# Altium PCB RealimentacionLineal.PcbDoc
Units mm, origin at the board's own origin, x right, y up, seen from the top; angles counter-clockwise.
Board outline 50 x 50 mm, 2 copper layers (Top Layer, Bottom Layer); 25 components, 18 nets, 69 pads, 12 vias.
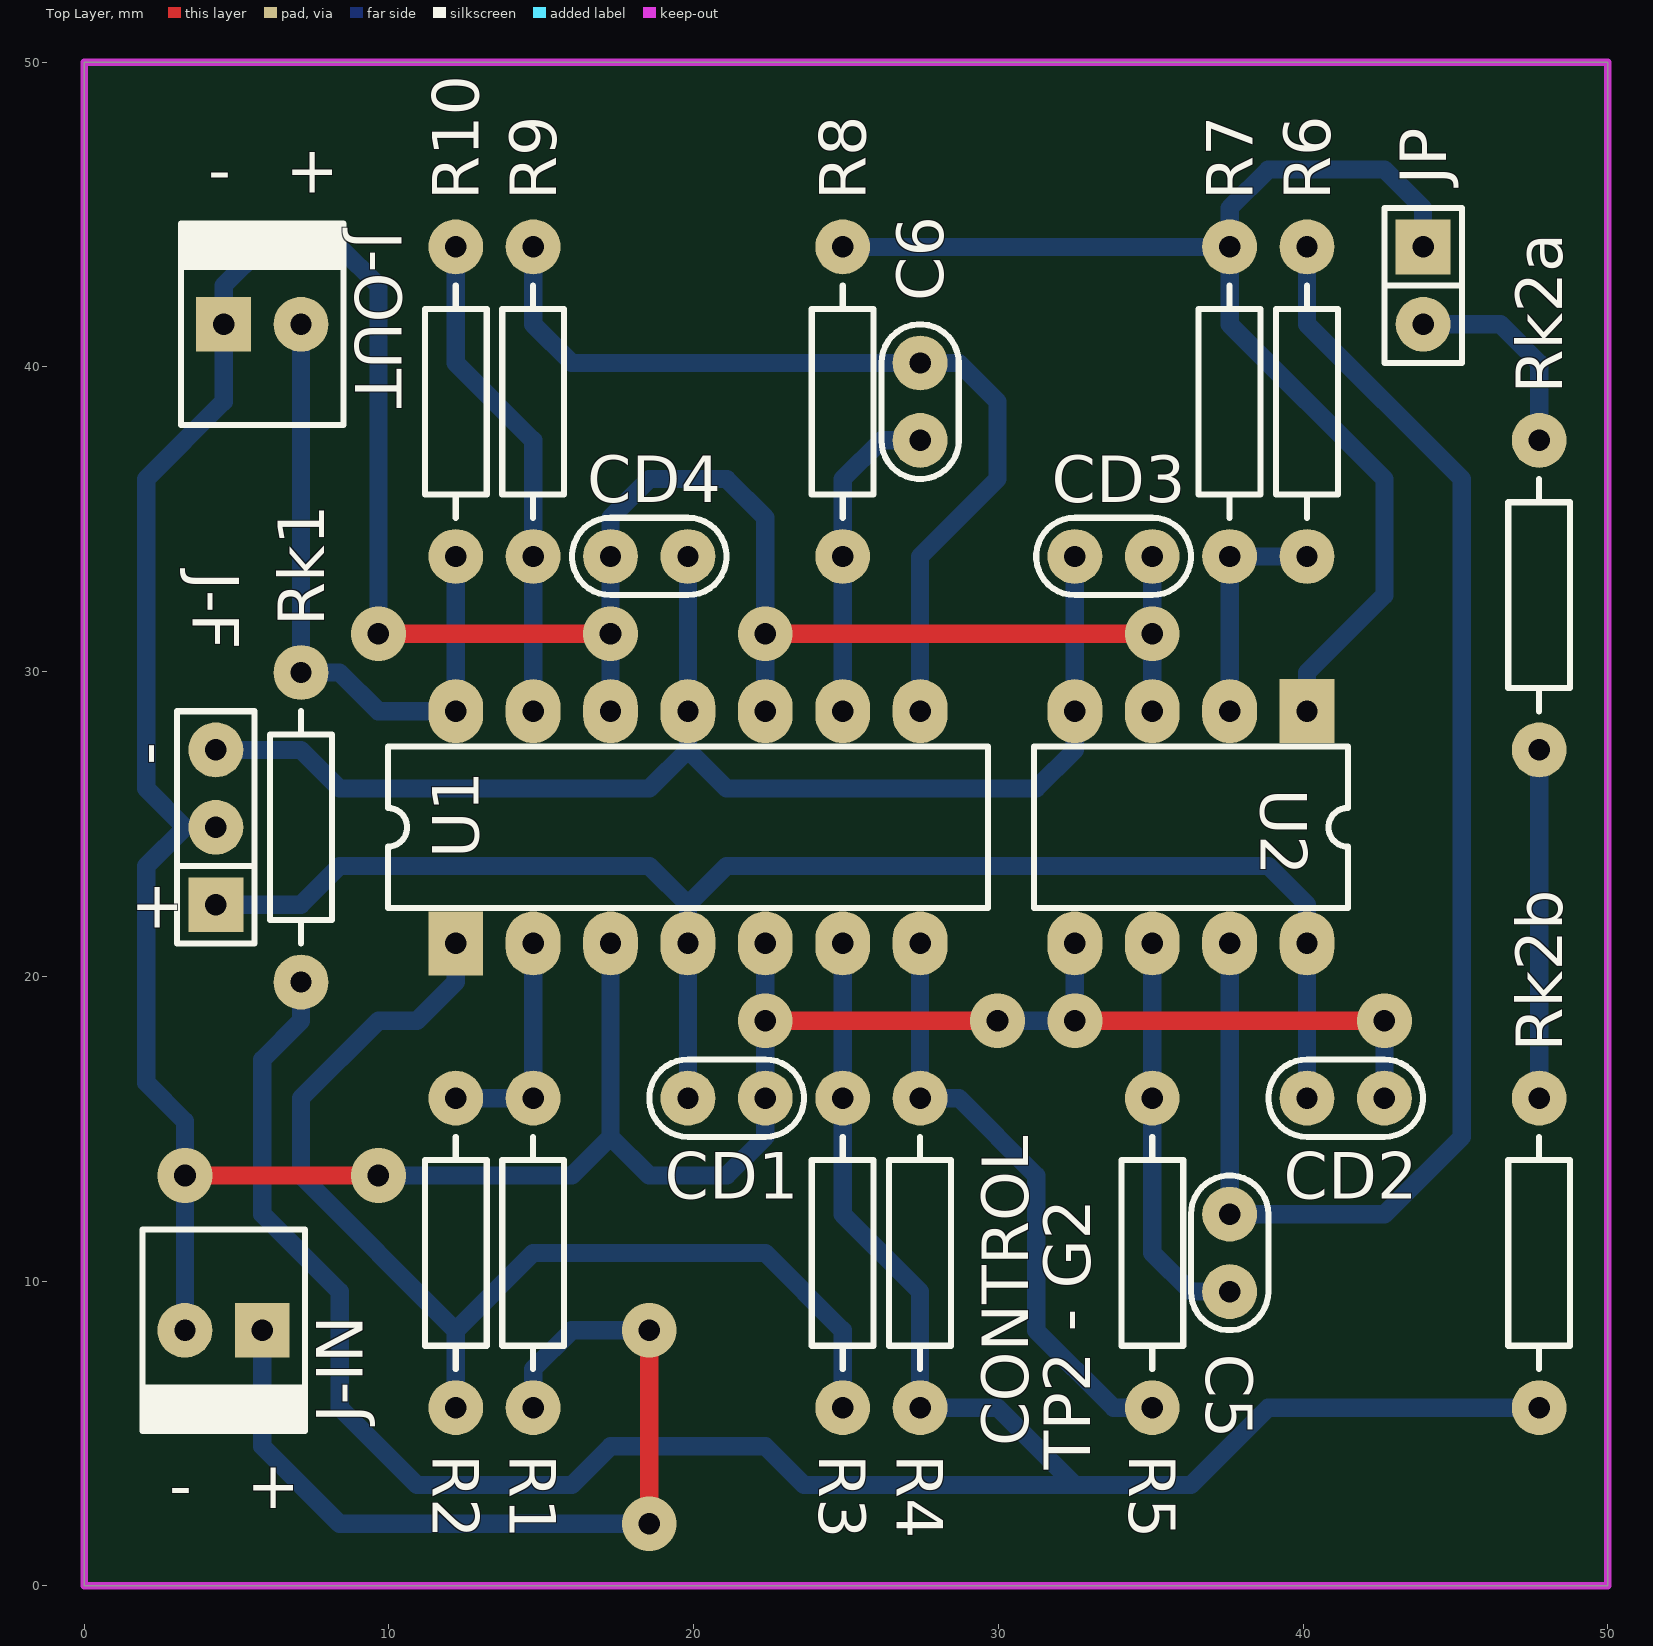
[diagram p0: Top Layer view]
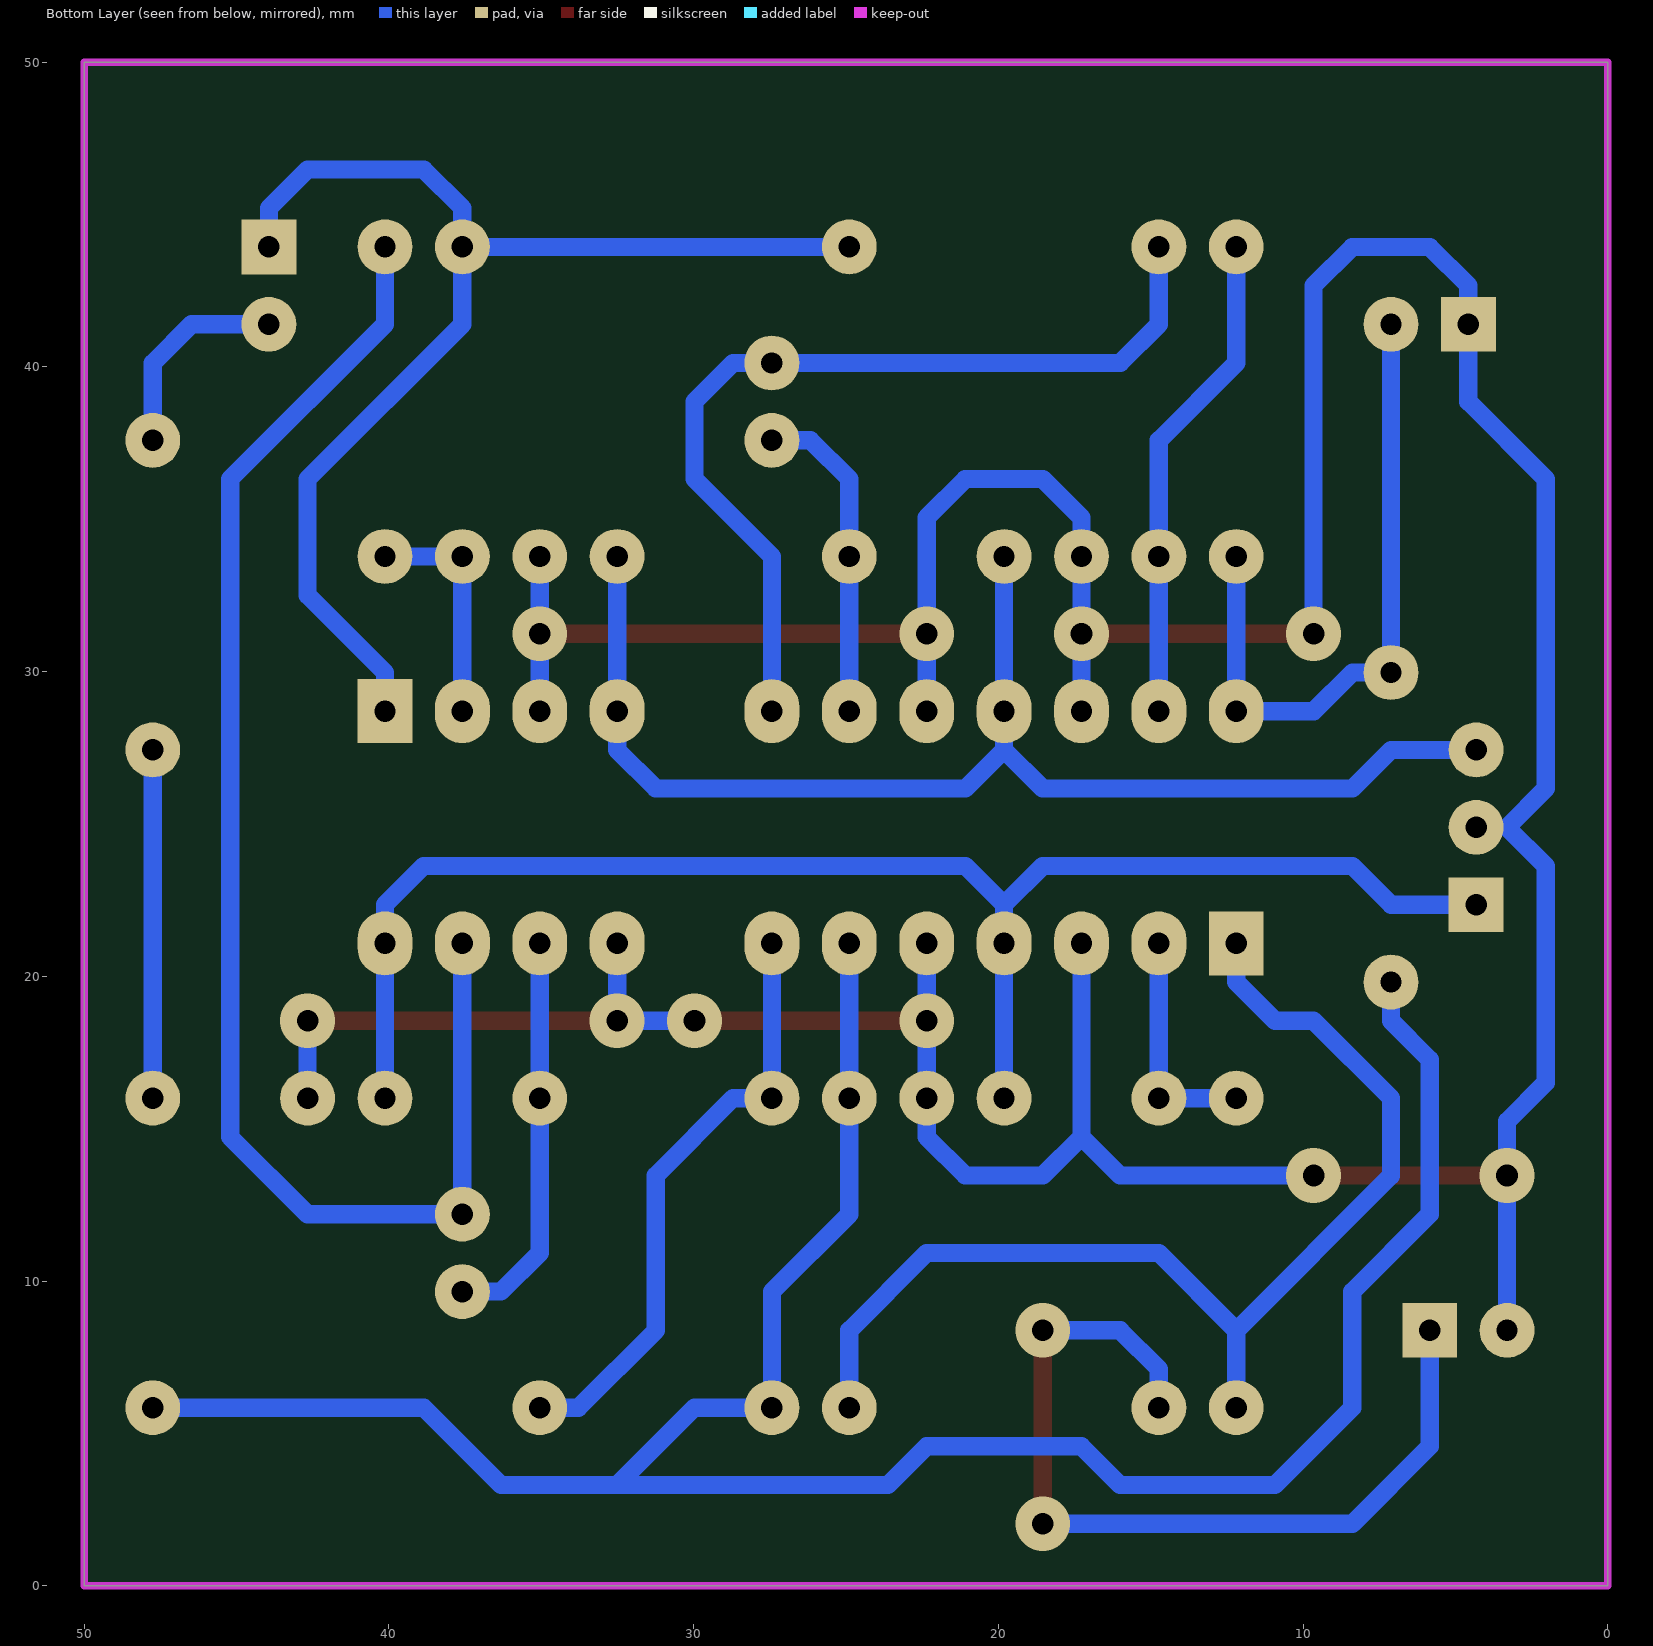
[diagram p1: Bottom Layer view, seen from below]
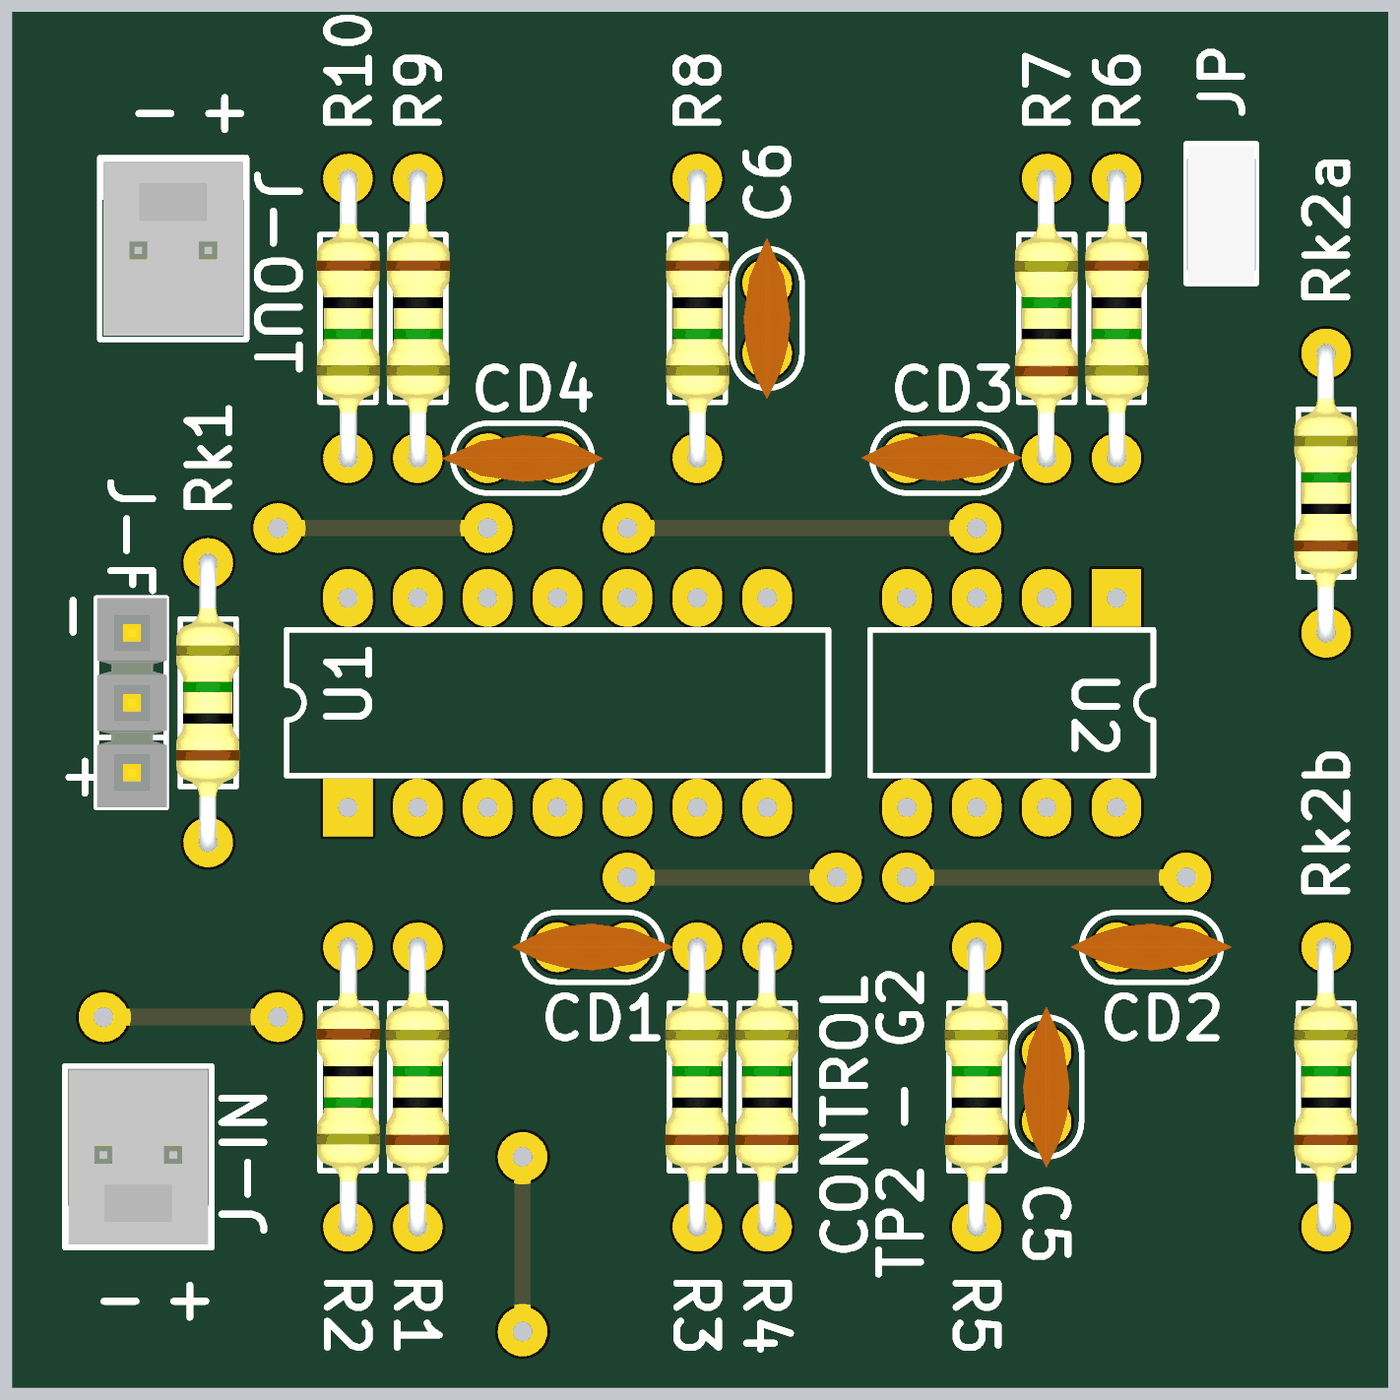
[diagram p2: 3D render of the assembled board from above, using the file's embedded part models]

## Layer stack, top to bottom
Top Solder: solder mask 0.0102, Solder Resist, Dk 3.5
Top Layer: signal copper 0.0356
Dielectric 1: dielectric 0.32, FR-4, Dk 4.8
Bottom Layer: signal copper 0.0356
Bottom Solder: solder mask 0.0102, Solder Resist, Dk 3.5

## Board outline
0,0 0,50 50,50 50,0

## Design rules (kind name [scope] priority, off if disabled: settings)
Clearance [All] p1: gap=0.6 ignorepadtopadclearanceinfootprint=FALSE
ComponentClearance [All] p1: gap=0.2 collisioncheckmode=3 verticalgap=0.254 showdistances=FALSE
PolygonConnect [All] p1: connectstyle=Relief reliefconductorwidth=0.254 reliefentries=4 polygonreliefangle="90 Angle" airgapwidth=0.254
RoutingVias [All] p1: holewidth=0.711 width=1.8 viastyle="Through Hole" minholewidth=0.711 minwidth=1.8 maxholewidth=0.711 maxwidth=1.8
SolderMaskExpansion [All] p1: expansion=0.102
Width [All] p1: maxlimit=0.6 minlimit=0.6 preferedwidth=0.6
29 further rules are at their usual default settings.

## Components (designator, comment, footprint, x,y, rotation, side; value= is the part's Value field where it differs from the comment)
C5 "1u" CAP100 37.592,10.922 r90 top
C6 "1u" CAP100 27.432,38.862 r90 top
CD1 "100n" CAP100 21.082,16.002 r0 top
CD2 "100n" CAP100 41.402,16.002 r0 top
CD3 "100n" CAP100 33.782,33.782 r0 top
CD4 "100n." CAP100 18.542,33.782 r180 top
J-F "FUENTE" SIP3 4.318,24.892 r90 top
J-IN "INPUT" MOLEX2 5.842,8.382 r180 top
J-OUT "OUTPUT" MOLEX2 4.572,41.402 r0 top
JP "JUMPER" JUMPER2 43.942,42.672 r270 top
R1 "10K" RES400 14.732,5.842 r90 top
R2 "10K" RES400 12.192,16.002 r270 top
R3 "10K" RES400 24.892,5.842 r90 top
R4 "10K" RES400 27.432,5.842 r90 top
R5 "100K" RES400 35.052,5.842 r90 top
R6 "10K" RES400 40.132,43.942 r270 top
R7 "10K" RES400 37.592,33.782 r90 top
R8 "47K" RES400 24.892,43.942 r270 top
R9 "10K" RES400 14.732,43.942 r270 top
R10 "10K" RES400 12.192,43.942 r270 top
Rk1 "10K" RES400 7.112,19.812 r90 top
Rk2a "6K8" RES400 47.752,27.432 r90 top
Rk2b "330" RES400 47.752,5.842 r90 top
U1 "TL084N" N014 19.812,24.892 r0 top
U2 "TL082JG" JG008 36.322,24.892 r180 top

## Footprints (in the part's own frame and the unit in brackets; to place one, negate y for a bottom-side part, rotate by r counter-clockwise, add the part's x,y. Pads: shape width x height; smd on the part's side, far side on the other; paste and mask are expansions set on the pad)
CAP100 [mm]
  round 1.8 hole 0.7: 1(-1.27,0) 2(1.27,0)
  silkscreen extent -2.54,-1.27 2.54,1.27, body extent -2.92,-0.84 2.92,0.86, height 6.12
JG008 [mm] "DIP; 8 Leads; Row Spacing 7.62 mm; Pitch 2.54 mm"
  rect 1.8x2.1 hole 0.7: 1(-3.81,-3.81)
  oval 1.8x2.1 hole 0.7: 2(-1.27,-3.81) 3(1.27,-3.81) 4(3.81,-3.81) 5(3.81,3.81) 6(1.27,3.81) 7(-1.27,3.81) 8(-3.81,3.81)
  silkscreen extent -5.15,-2.65 5.15,2.65
JUMPER2 [mm]
  rect 1.8x1.8 hole 0.7: 1(-1.27,0)
  round 1.8 hole 0.7: 2(1.27,0)
  silkscreen extent -2.54,-1.27 2.54,1.27, body extent -2.46,-1.27 2.54,1.27, height 9.5
MOLEX2 [mm]
  rect 1.8x1.8 hole 0.7: 1(0,0)
  round 1.8 hole 0.7: 2(2.54,0)
  silkscreen extent -1.4,-3.3 3.94,3.3, body extent -1.27,-3.17 3.81,3.18, height 10.74
N014 [mm] "DIP; 14 Leads; Row Spacing 7.62 mm; Pitch 2.54 mm"
  rect 1.8x2.1 hole 0.7: 1(-7.62,-3.81)
  oval 1.8x2.1 hole 0.7: 2(-5.08,-3.81) 3(-2.54,-3.81) 4(0,-3.81) 5(2.54,-3.81) 6(5.08,-3.81) 7(7.62,-3.81) 8(7.62,3.81) 9(5.08,3.81) 10(2.54,3.81) 11(0,3.81) 12(-2.54,3.81) 13(-5.08,3.81) 14(-7.62,3.81)
  silkscreen extent -9.85,-2.65 9.85,2.65
RES400 [mm]
  round 1.8 hole 0.7: 1(0,0) 2(10.16,0)
  silkscreen extent 1.27,-1.02 8.89,1.02, body extent -0.3,-1.14 10.46,1.17, height 2.43
SIP3 [mm]
  rect 1.8x1.8 hole 0.7: 1(-2.54,0)
  round 1.8 hole 0.7: 2(0,0) 3(2.54,0)
  silkscreen extent -3.81,-1.27 3.81,1.27, body extent -3.81,-1.3 3.81,1.24, height 8.38

## Part data
C5 C6 CD1 CD2 CD3 CD4: library part CAP
J-F: library part CON3
J-IN J-OUT: library part MOLEX2
R1 R2 R3 R4 R5 R6 R7 R8 R9 R10 Rk1 Rk2a Rk2b: library part RES
U1 U2: "JFET-Input Operational Amplifier", ComponentLink1Description="Manufacturer Link", ComponentLink1URL=http://www.ti.com/, ComponentLink2Description=Datasheet, DatasheetVersion=Feb-1999, LatestRevisionDate=04-Mar-2005, LatestRevisionNote="Stylized 3D Model Added.", Published=16-Jan-2001, Publisher="Altium Limited"
  U1: ComponentLink2URL=http://www-s.ti.com/sc/ds/tl084.pdf, PackageDescription="DIP; 14 Leads; Row Spacing 7.62 mm; Pitch 2.54 mm", PackageReference=N014, PackageVersion=Oct-1995
  U2: ComponentLink2URL=http://www-s.ti.com/sc/ds/tl082.pdf, PackageDescription="DIP; 8 Leads; Row Spacing 7.62 mm; Pitch 2.54 mm", PackageReference=JG008, PackageVersion=Jan-1995

## Via types
v1: diameter 1.8, hole 0.711, Top Layer to Bottom Layer, 12 vias

## Nets (pads, with @x,y where several pads share a name; then routed paths per layer and width w, separated by ;. In a path a pad name is that pad's centre, name@x,y a point inside that pad or via, vN(x,y) a via of type N, cw(c..) or ccw(c..) an arc to the next point about the centre after c; other vN are vias at no path point)
+12V: CD1.1 CD2.1 J-F.1 U1.4 U2.8 | length 50.6
  Bottom Layer w0.6: J-F.1 7.112,22.352 8.382,23.622 18.542,23.622 19.812,22.352 ; CD1.1 U1.4 19.812,22.352 ; CD2.1 U2.8 40.132,22.352 38.862,23.622 21.082,23.622 19.812,22.352
-12V: CD3.1 CD4.1 J-F.3 U1.11 U2.4 | length 43
  Bottom Layer w0.6: J-F.3 7.112,27.432 8.382,26.162 18.542,26.162 19.812,27.432 ; CD4.1 U1.11 19.812,27.432 ; CD3.1 U2.4 32.512,27.432 31.242,26.162 21.082,26.162 19.812,27.432
GND: CD1.2 CD2.2 CD3.2 CD4.2 J-F.2 J-IN.2 J-OUT.1 U1.3 U1.5 U1.10 U1.12 U2.3 U2.5 | length 157.4
  Top Layer w0.6: v1(3.302,13.462) v1(9.652,13.462) ; v1(9.652,31.242) v1(17.272,31.242) ; v1(22.352,18.542) v1(29.972,18.542) ; v1(22.352,31.242) v1(35.052,31.242) ; v1(32.512,18.542) v1(42.672,18.542)
  Bottom Layer w0.6: J-IN.2 v1(3.302,13.462) 3.302,15.24 2.032,16.51 2.032,23.622 3.302,24.892 2.032,26.162 2.032,36.322 4.572,38.862 J-OUT.1 4.572,42.672 5.842,43.942 8.382,43.942 9.652,42.672 v1(9.652,31.242) ; v1(9.652,13.462) 16.002,13.462 17.272,14.732 ; U1.3 17.272,14.732 ; U1.12 v1(17.272,31.242) CD4.2 17.272,35.052 18.542,36.322 21.082,36.322 22.352,35.052 v1(22.352,31.242) U1.10 ; U1.5 v1(22.352,18.542) CD1.2 22.352,14.732 21.082,13.462 18.542,13.462 17.272,14.732 ; v1(29.972,18.542) v1(32.512,18.542) U2.5 ; U2.3 v1(35.052,31.242) CD3.2 ; CD2.2 v1(42.672,18.542)
NetC5_1: C5.1 R5.2 U2.6 | length 13.2
  Bottom Layer w0.6: U2.6 R5.2 35.052,10.922 36.322,9.652 C5.1
NetC5_2: C5.2 R6.1 U2.7 | length 48.9
  Bottom Layer w0.6: U2.7 C5.2 42.672,12.192 45.212,14.732 45.212,36.322 40.132,41.402 R6.1
NetC6_1: C6.1 R8.2 U1.9 | length 10.7
  Bottom Layer w0.6: U1.9 R8.2 24.892,36.322 26.162,37.592 C6.1
NetC6_2: C6.2 R9.1 U1.8 | length 30
  Bottom Layer w0.6: R9.1 14.732,41.402 16.002,40.132 C6.2 28.702,40.132 29.972,38.862 29.972,36.322 27.432,33.782 U1.8
NetJ-IN_1: J-IN.1 R1.1 | length 29.5
  Top Layer w0.6: v1(18.542,2.032) v1(18.542,8.382)
  Bottom Layer w0.6: J-IN.1 5.842,4.572 8.382,2.032 v1(18.542,2.032) ; R1.1 14.732,7.112 16.002,8.382 v1(18.542,8.382)
NetJ-OUT_2: J-OUT.2 R10.2 Rk1.2 U1.14 | length 22.1
  Bottom Layer w0.6: J-OUT.2 Rk1.2 8.376,29.972 9.646,28.702 U1.14 R10.2
NetJP_1: JP.1 R7.2 R8.1 U2.1 | length 41
  Bottom Layer w0.6: R8.1 R7.2 ; U2.1 40.132,29.972 42.672,32.512 42.672,36.322 37.592,41.402 R7.2 ; JP.1 43.942,45.212 42.672,46.482 38.862,46.482 37.592,45.212 R7.2
NetJP_2: JP.2 Rk2a.2 | length 6.9
  Bottom Layer w0.6: JP.2 46.482,41.402 47.752,40.132 Rk2a.2
NetR1_2: R1.2 R2.1 U1.2 | length 7.6
  Bottom Layer w0.6: R2.1 R1.2 U1.2
NetR2_2: R2.2 R3.1 U1.1 | length 37.5
  Bottom Layer w0.6: R2.2 12.192,8.382 ; U1.1 12.192,19.812 10.922,18.542 9.652,18.542 7.112,16.002 7.112,13.456 12.186,8.382 12.192,8.382 ; R3.1 24.892,8.382 22.352,10.922 14.732,10.922 12.192,8.382
NetR3_2: R3.2 R4.1 Rk1.1 Rk2b.1 U1.6 | length 80.5
  Bottom Layer w0.6: Rk1.1 7.112,18.542 5.842,17.272 5.842,12.192 8.382,9.652 8.382,5.842 10.922,3.302 16.002,3.302 17.272,4.572 22.352,4.572 23.622,3.302 32.512,3.302 ; U1.6 R3.2 24.892,12.192 27.432,9.652 R4.1 29.972,5.842 32.512,3.302 ; Rk2b.1 38.862,5.842 36.322,3.302 32.512,3.302
NetR4_2: R4.2 R5.1 U1.7 | length 19.9
  Bottom Layer w0.6: U1.7 R4.2 28.702,16.002 31.242,13.462 31.242,8.382 33.782,5.842 R5.1
NetR6_2: R6.2 R7.1 U2.2 | length 7.6
  Bottom Layer w0.6: U2.2 R7.1 R6.2
NetR9_2: R9.2 R10.1 U1.13 | length 16.3
  Bottom Layer w0.6: R10.1 12.192,40.132 14.732,37.592 R9.2 U1.13
NetRk2a_1: Rk2a.1 Rk2b.2 | length 11.4
  Bottom Layer w0.6: Rk2b.2 Rk2a.1

## Keep-outs
Keep-Out Layer:
  the board outline again, w0.254

## Silkscreen, mask and mechanical layers (free items; w line width, h text height)
Top Overlay:
  text "-" at 4.064,45.72 h1.52
  text "+" at 6.604,45.72 h1.52
  text "-" at 2.794,26.924 h1.52 r90
  text "+" at 1.524,21.59 h1.52
  text "CONTROL" at 30.988,4.572 h1.52 r90
  text "TP2 - G2" at 33.02,3.81 h1.52 r90
  text "-" at 2.794,2.54 h1.52
  text "+" at 5.334,2.54 h1.52